# Altium PCB PCB2.PcbDoc
Units mm, origin at the board's own origin, x right, y up, seen from the top; angles counter-clockwise.
Board outline 90.02 x 108.25 mm, 2 copper layers (Top Layer, Bottom Layer); 75 components, 64 nets, 332 pads, 80 vias.
Unrouted connection lines stored in the file: 1.
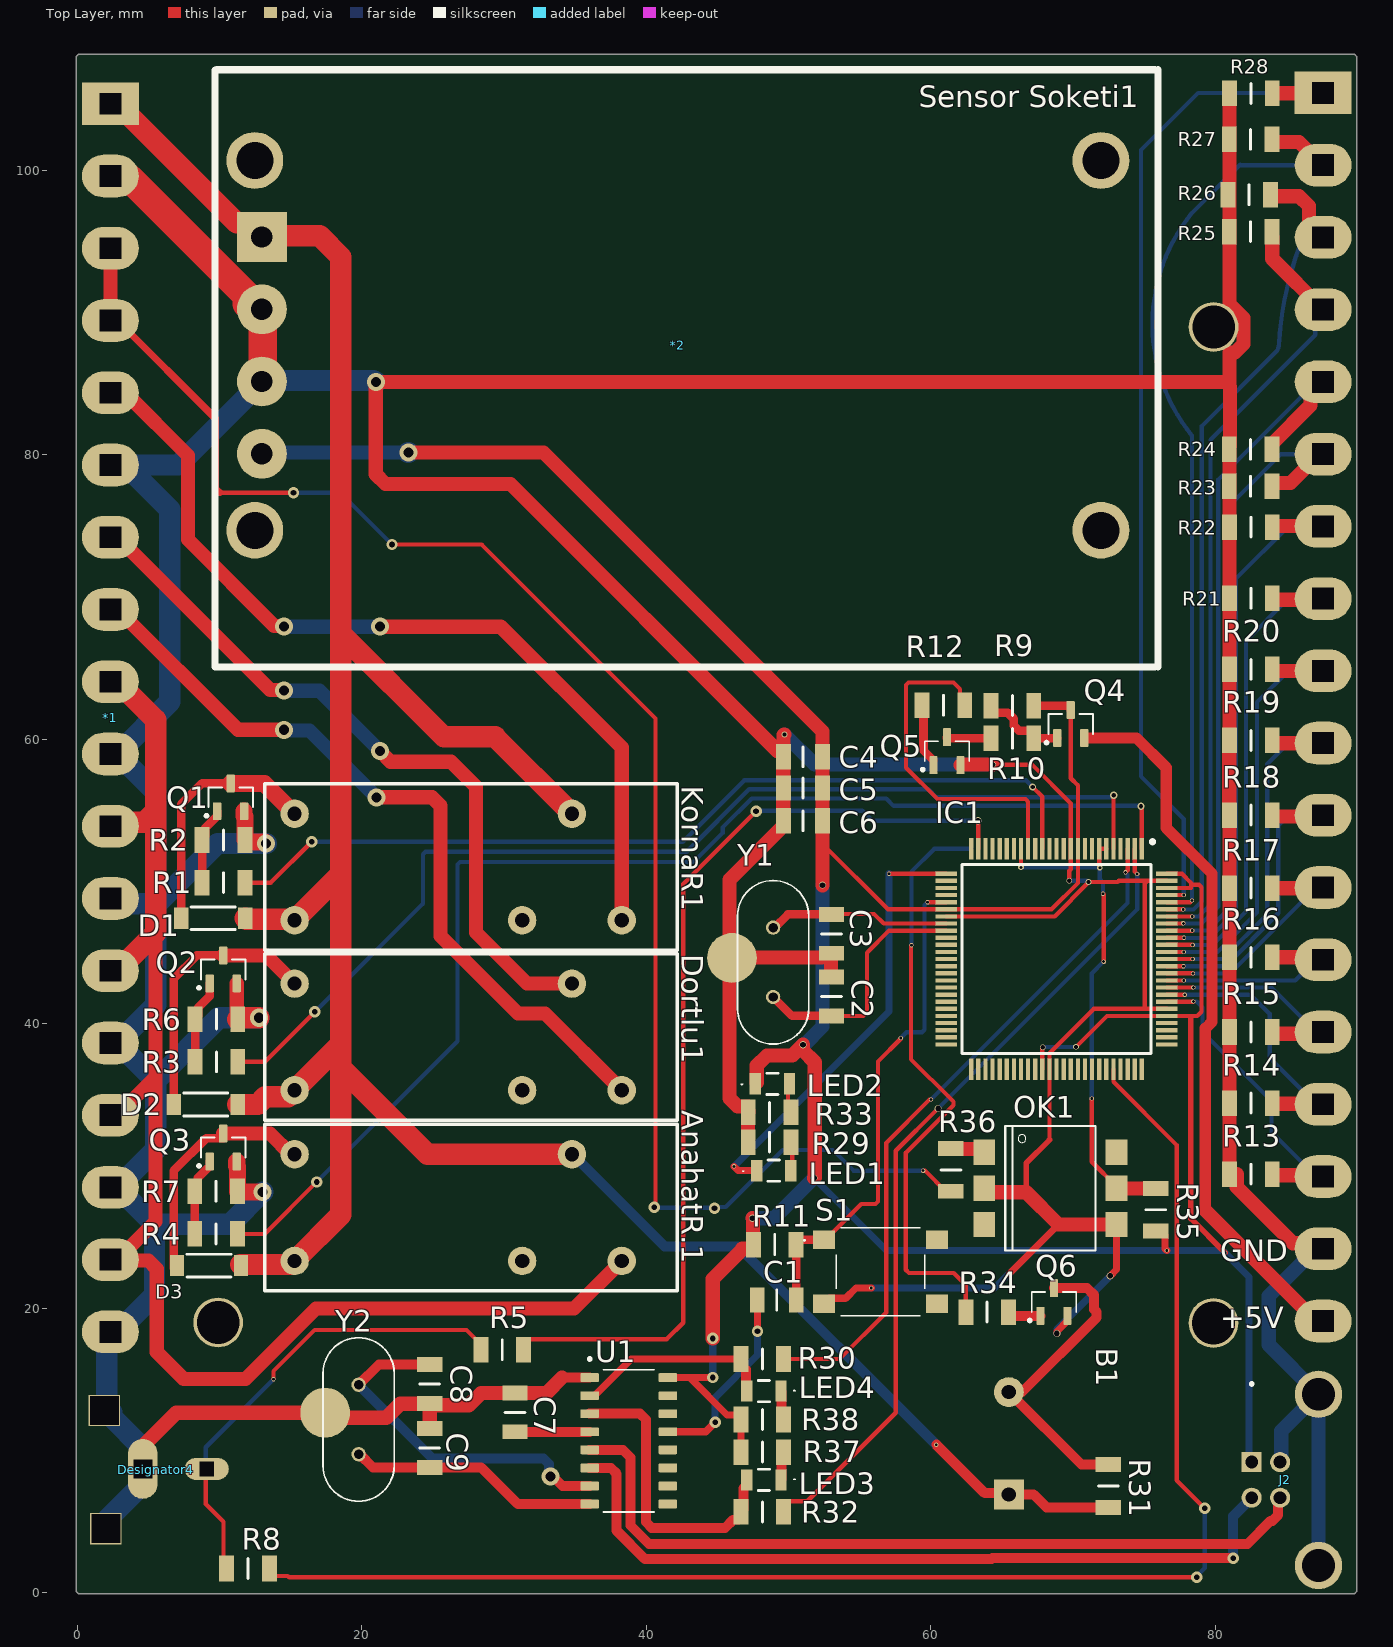
[diagram p0: Top Layer view]
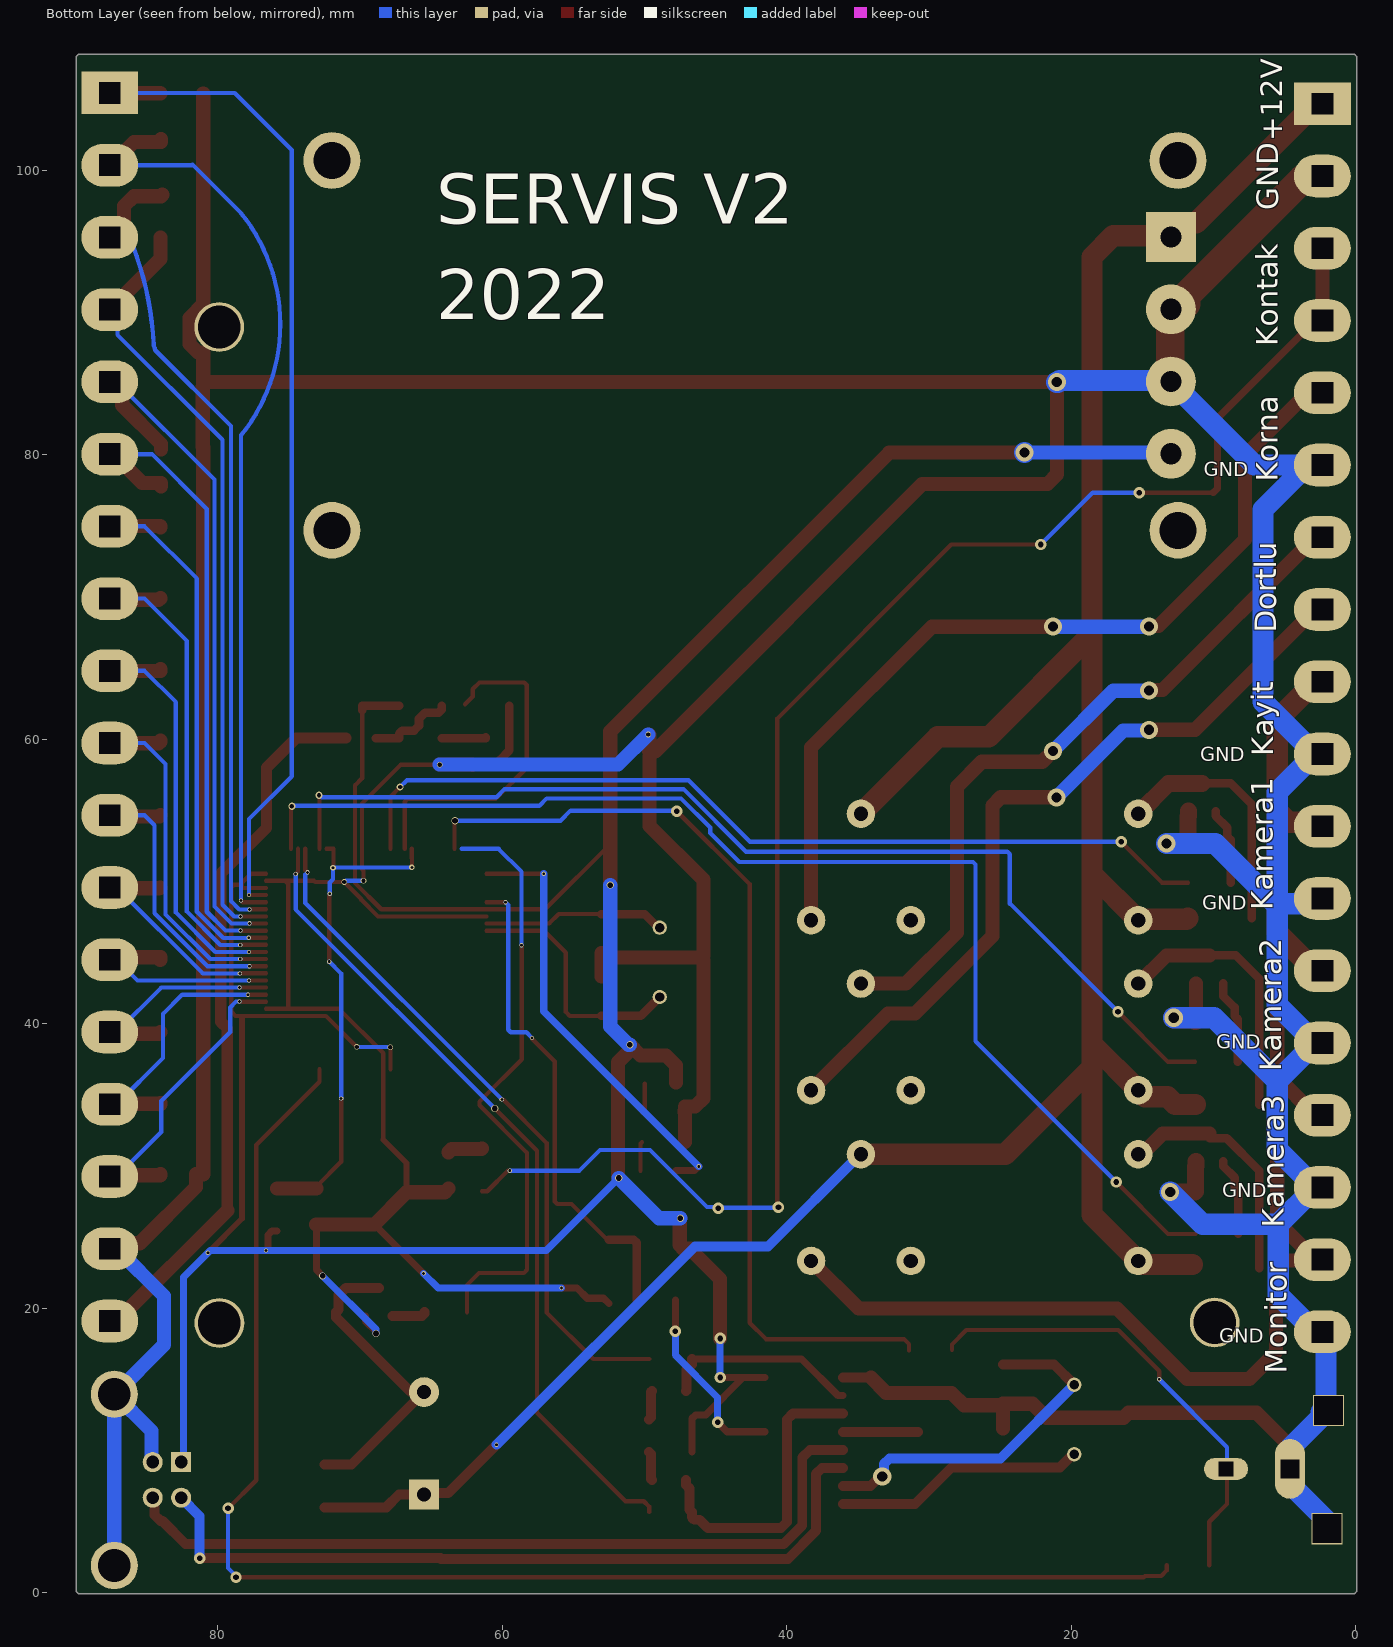
[diagram p1: Bottom Layer view, seen from below]
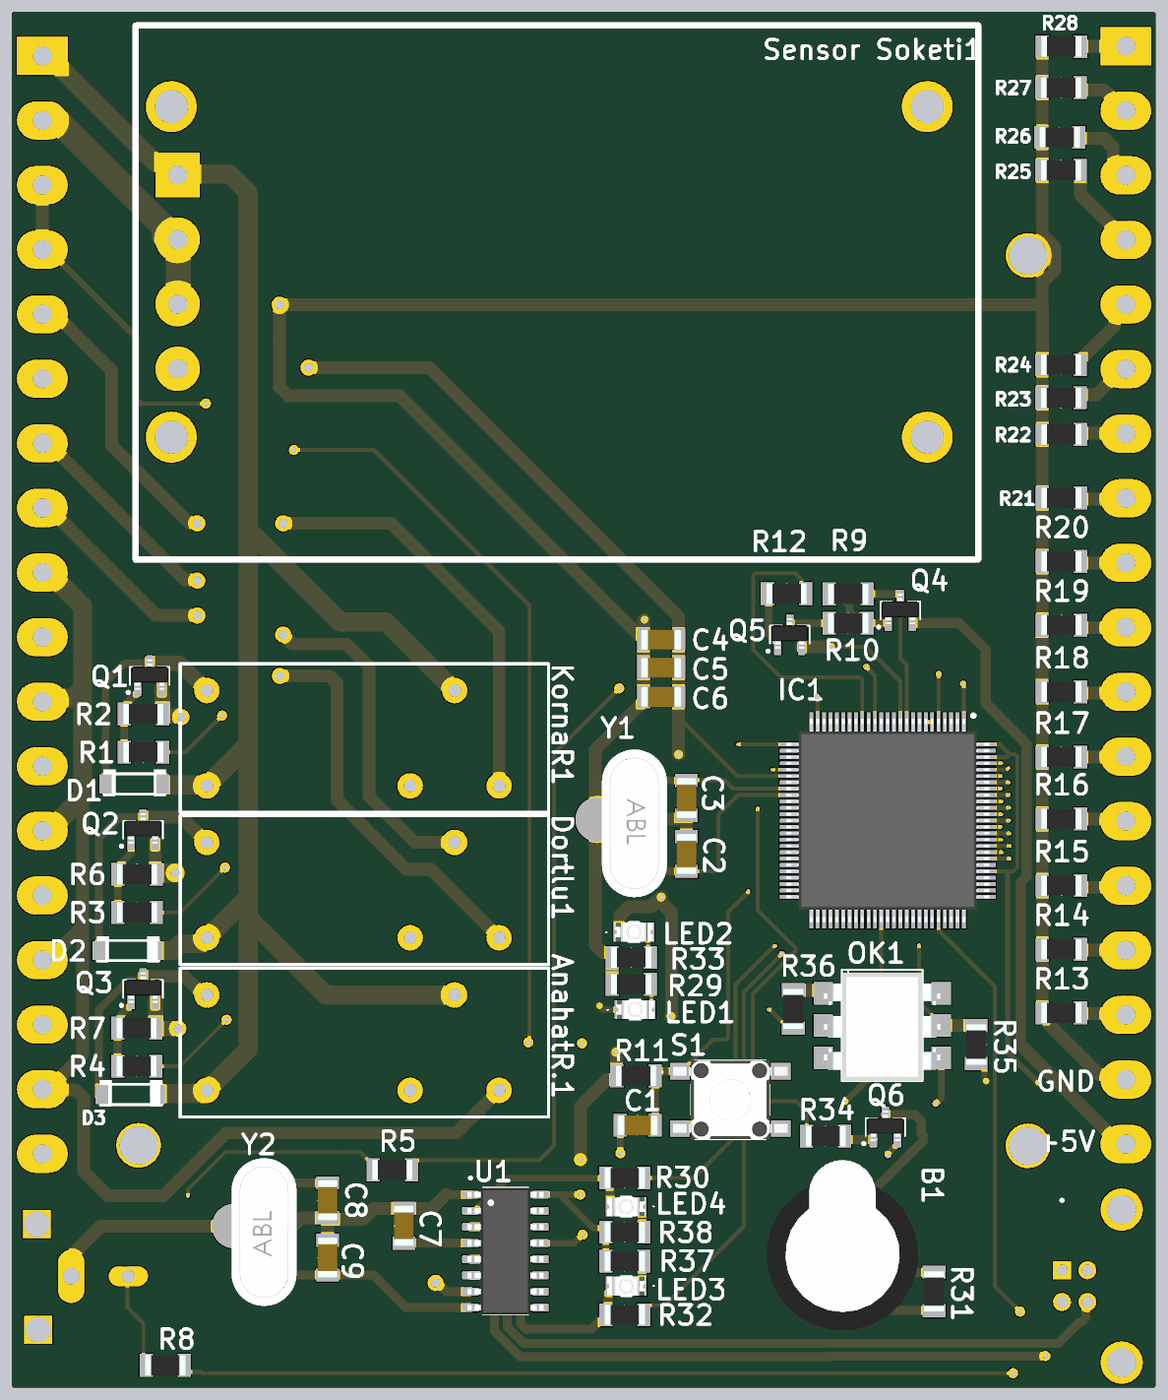
[diagram p2: 3D render of the assembled board from above, using the file's embedded part models]

## Layer stack, top to bottom
Top Solder: solder mask 0.0102, Solder Resist, Dk 3.5
Top Layer: signal copper 0.0356
Dielectric 1: dielectric 0.32, FR-4, Dk 4.8
Bottom Layer: signal copper 0.0356
Bottom Solder: solder mask 0.0102, Solder Resist, Dk 3.5

## Board outline
-0.074,0.074 -0.074,108.026 0.074,108.175 89.801,108.175 89.95,108.026 89.95,0.074 89.801,-0.074 0.074,-0.074

## Design rules (kind name [scope] priority, off if disabled: settings)
Clearance [All] p1: gap=0.19 ignorepadtopadclearanceinfootprint=FALSE except(0: Arc-Hole Track-Hole SMDPad-Hole THPad-Hole Via-Hole Fill-Hole Poly-Hole Region-Hole Text-Hole)
ComponentClearance [All] p1: gap=0 collisioncheckmode=3 verticalgap=0 showdistances=FALSE
PolygonConnect [All] p1: connectstyle=Relief reliefconductorwidth=0.254 reliefentries=4 polygonreliefangle="90 Angle" airgapwidth=0.254
RoutingVias [All] p1: holewidth=0.711 width=1.27 viastyle="Through Hole" minholewidth=0.1 minwidth=0.1 maxholewidth=10 maxwidth=10
SolderMaskExpansion [All] p1: expansion=0.102 istentingtop=FALSE
Width [All] p1: maxlimit=10 minlimit=0.1 preferedwidth=0.254 minimp=50.000000 maximp=50.000000 favimp=50.000000
29 further rules are at their usual default settings.

## Classes and differential pairs
component class Sheet1: *2 AnahatR.1 B1 C1 C2 C3 C4 C5 C6 C7 C8 C9 D1 D2 D3 Dortlu1 IC1 J2 KornaR1 LED1 LED2 LED3 LED4 OK1 Q1 Q2 Q3 Q4 Q5 Q6 R1 R2 R3 R4 R5 R6 R7 R8 R9 R10 R11 R12 R13 R14 R15 R16 R17 R18 R19 R21 R29 R30 R31 R32 R33 R34 R35 R36 R37 R38 S1 T1 T2 T3 U1 Y1 Y2

## Components (designator, comment, footprint, x,y, rotation, side; value= is the part's Value field where it differs from the comment)
*1 "18PİN" 18X5,08 2.327,104.696 r270 top
*2 "12/5 DC/DC" "12/5V DC/DC" 12.977,85.166 r0 top
AnahatR.1 "Röle" RöLE 15.277,23.326 r0 top
B1 "Buzzer" BUZZER 65.5,6.9 r90 top
C1 "100nF 1206" "CAPC3216X95N(100NF 1206)" 49.177,20.576 r0 top
C2 "22pF 1206" "CAPC3216X95N(100NF 1206)" 53.027,41.926 r90 top
C3 "22pF 1206" "CAPC3216X95N(100NF 1206)" 53.027,46.326 r270 top
C4 "100nF 1206" "CAPC3216X95N(100NF 1206)" 51.027,58.776 r0 top
C5 "1uF 1206" "CAPC3216X95N(100NF 1206)" 51.027,56.576 r0 top
C6 "10uF 1206" "CAPC3216X95N(100NF 1206)" 51.027,54.276 r0 top
C7 "10nF 1206" "CAPC3216X95N(100NF 1206)" 30.777,12.676 r90 top
C8 "18pF 1206" "CAPC3216X95N(100NF 1206)" 24.777,14.676 r90 top
C9 "18pF 1206" "CAPC3216X95N(100NF 1206)" 24.777,10.176 r270 top
D1 "1N4007" 1N4007 11.802,47.426 r180 top
D2 "1N4007" 1N4007 11.277,34.326 r180 top
D3 "1N4007" 1N4007 11.5,23 r180 top
Designator4 "Comment" RCA 1.8,8.9 r180 top
Dortlu1 "Röle" RöLE 15.277,35.326 r0 top
IC1 "ATMEGA2560-16AI" QFP50P1600X1600X120-100N 68.857,44.552 r270 top
J2 "USB-B-S-X-X-TH" USB-B-S-X-X-TH 87.277,7.926 r90 top
KornaR1 "Röle" RöLE 15.277,47.276 r0 top
LED1 "led 1206" "LED 1206" 48.977,29.676 r0 top
LED2 "led 1206" "LED 1206" 48.877,35.776 r0 top
LED3 "led 1206" "LED 1206" 48.277,7.926 r180 top
LED4 "led 1206" "LED 1206" 48.277,14.176 r180 top
OK1 "4N25 SOIC6" "4N25 SOIC6" 68.427,28.426 r270 top
Q1 "BC817" "BC817 SOT23" 10.781,55.926 r90 top
Q2 "BC817" "BC817 SOT23" 10.256,43.826 r90 top
Q3 "BC817" "BC817 SOT23" 10.256,31.306 r90 top
Q4 "BC817" "BC817 SOT23" 69.852,61.076 r90 top
Q5 "BC817" "BC817 SOT23" 61.152,59.176 r90 top
Q6 "BC817" "BC817 SOT23" 68.677,20.436 r90 top
R1 "1K Res 1206" "RESC3216X60N ( 1206 )" 10.277,49.926 r180 top
R2 "10K Res 1206" "RESC3216X60N ( 1206 )" 10.277,52.926 r180 top
R3 "1K Res 1206" "RESC3216X60N ( 1206 )" 9.777,37.326 r180 top
R4 "1K Res 1206" "RESC3216X60N ( 1206 )" 9.752,25.226 r180 top
R5 "1K Res 1206" "RESC3216X60N ( 1206 )" 29.875,17.075 r180 top
R6 "10K Res 1206" "RESC3216X60N ( 1206 )" 9.777,40.326 r180 top
R7 "10K Res 1206" "RESC3216X60N ( 1206 )" 9.752,28.226 r180 top
R8 "470R 1206" "RESC3216X60N ( 1206 )" 12,1.7 r180 top
R9 "10K Res 1206" "RESC3216X60N ( 1206 )" 65.752,62.376 r0 top
R10 "1K Res 1206" "RESC3216X60N ( 1206 )" 65.752,60.076 r0 top
R11 "10K Res 1206" "RESC3216X60N ( 1206 )" 49.042,24.476 r0 top
R12 "1K Res 1206" "RESC3216X60N ( 1206 )" 60.9,62.4 r180 top
R13 "10K Res 1206" "RESC3216X60N ( 1206 )" 82.527,29.426 r0 top
R14 "10K Res 1206" "RESC3216X60N ( 1206 )" 82.527,34.426 r0 top
R15 "10K Res 1206" "RESC3216X60N ( 1206 )" 82.527,39.426 r0 top
R16 "10K Res 1206" "RESC3216X60N ( 1206 )" 82.527,44.676 r0 top
R17 "10K Res 1206" "RESC3216X60N ( 1206 )" 82.527,49.546 r0 top
R18 "10K Res 1206" "RESC3216X60N ( 1206 )" 82.527,54.676 r0 top
R19 "10K Res 1206" "RESC3216X60N ( 1206 )" 82.527,59.926 r0 top
R20 "10K Res 1206" "RESC3216X60N ( 1206 )" 82.527,64.926 r0 top
R21 "10K Res 1206" "RESC3216X60N ( 1206 )" 82.527,69.926 r0 top
R22 "10K Res 1206" "RESC3216X60N ( 1206 )" 82.527,74.926 r0 top
R23 "10K Res 1206" "RESC3216X60N ( 1206 )" 82.5,77.8 r0 top
R24 "10K Res 1206" "RESC3216X60N ( 1206 )" 82.5,80.4 r0 top
R25 "10K Res 1206" "RESC3216X60N ( 1206 )" 82.5,95.7 r0 top
R26 "10K Res 1206" "RESC3216X60N ( 1206 )" 82.4,98.3 r0 top
R27 "10K Res 1206" "RESC3216X60N ( 1206 )" 82.5,102.2 r0 top
R28 "10K Res 1206" "RESC3216X60N ( 1206 )" 82.527,105.426 r0 top
R29 "470R 1206" "RESC3216X60N ( 1206 )" 48.677,31.676 r180 top
R30 "1K Res 1206" "RESC3216X60N ( 1206 )" 48.168,16.426 r0 top
R31 "1K Res 1206" "RESC3216X60N ( 1206 )" 72.5,7.5 r270 top
R32 "1K Res 1206" "RESC3216X60N ( 1206 )" 48.168,5.676 r0 top
R33 "470R 1206" "RESC3216X60N ( 1206 )" 48.677,33.776 r180 top
R34 "1K Res 1206" "RESC3216X60N ( 1206 )" 63.977,19.726 r0 top
R35 "10K Res 1206" "RESC3216X60N ( 1206 )" 75.827,26.926 r270 top
R36 "1K Res 1206" "RESC3216X60N ( 1206 )" 61.427,29.726 r90 top
R37 "2.7K Res" "RESC3216X60N ( 1206 )" 48.168,9.881 r180 top
R38 "2.7K Res" "RESC3216X60N ( 1206 )" 48.168,12.176 r180 top
S1 "Switch 6x6mm" "6X6X8MM PUSH BUTON" 56.477,22.576 r0 top
"Sensor Soketi1" "18PİN" 18X5,08 87.602,105.461 r270 top (schematic designator "Sensör Soketi1")
U1 "CH340G" SOIC16 38.777,10.676 r0 top
Y1 "16.000MHZ Crsytal" XTAL_DIP 48.927,44.326 r270 top
Y2 "12.000MHZ Crsytal" XTAL_DIP 19.777,12.176 r90 top

## Footprints (in the part's own frame and the unit in brackets; to place one, negate y for a bottom-side part, rotate by r counter-clockwise, add the part's x,y. Pads: shape width x height; smd on the part's side, far side on the other; paste and mask are expansions set on the pad)
1N4007 [mm]
  rect 1x1.5 smd: 1(0,0) 2(4.5,0)
  silkscreen extent 0.7,-0.8 3.8,0.8, body extent -0.45,-1.9 4.85,1.72
"4N25 SOIC6" [mm]
  rect 1.78x1.52 smd: 1(-2.54,-4.645) 2(0,-4.645) 3(2.54,-4.645) 4(2.54,4.645) 5(0,4.645) 6(-2.54,4.645)
  silkscreen extent -4.39,-3.18 4.36,3.18, body extent -4.16,-4.58 4.36,4.58, height 4.99
"6X6X8MM PUSH BUTON" [mm]
  rect 1.55x1.3 smd: 1(-3.975,2.25) 2(-3.975,-2.25) 3(3.975,2.25) 4(3.975,-2.25)
  silkscreen extent -5.4,-3.1 3.1,3.1, body extent -4.5,-3.1 4.5,3.1, height 5
"12/5V DC/DC" [mm]
  rect 3.5x3.5 hole 1.5: 1(0,10.16)
  round 3.5 hole 1.5: 2(0,5.08) 3(0,0) 4(0,-5.08)
  round 4 hole 2.6: ""(-0.5,-10.46) ""(-0.5,15.54) ""(59,-10.46) ""(59,15.54)
  silkscreen extent -3.3,-20.09 63,21.93
18X5,08 [mm]
  rect 3x4 hole 1.5 square: 1(0,0)
  oval 3x4 hole 1.5 square: 2(5.08,0) 3(10.16,0) 4(15.24,0) 5(20.32,0) 6(25.4,0) 7(30.48,0) 8(35.56,0) 9(40.64,0) 10(45.72,0) 11(50.8,0) 12(55.88,0) 13(60.96,0) 14(66.04,0) 15(71.12,0) 16(76.2,0) 17(81.28,0) 18(86.36,0)
"BC817 SOT23" [mm]
  rrect25% 1.26x0.59 smd: 1(-0.98,0.95) 2(-0.98,-0.95) 3(0.98,0)
  silkscreen extent -1.4,-1.56 0.7,1.8, body extent -1.1,-1.45 1.3,1.45, height 0.91
BUZZER [mm]
  rect 2.1x2.1 hole 1: 1(0,0)
  round 2.1 hole 1: 2(7.2,0)
  body extent -2.5,-5.8 10.94,6.2, height 9.55
"CAPC3216X95N(100NF 1206)" [mm]
  rect 1.04x1.78 smd: 1(-1.37,0) 2(1.37,0)
  silkscreen extent 0,-0.7 0,0.7, body extent -1.6,-0.8 1.6,0.8, height 0.95
"LED 1206" [mm]
  rect 0.8x1.5 smd: 1(-1.2,0) 2(1.2,0)
  silkscreen extent -2.2,-0.75 0.4,0.75, body extent -1.5,-0.75 1.5,0.75, height 1.21
QFP50P1600X1600X120-100N [mm]
  rect 1.5x0.3 smd: 1(-7.75,6) 2(-7.75,5.5) 3(-7.75,5) 4(-7.75,4.5) 5(-7.75,4) 6(-7.75,3.5) 7(-7.75,3) 8(-7.75,2.5) 9(-7.75,2) 10(-7.75,1.5) 11(-7.75,1) 12(-7.75,0.5) 13(-7.75,0) 14(-7.75,-0.5) 15(-7.75,-1) 16(-7.75,-1.5) 17(-7.75,-2) 18(-7.75,-2.5) 19(-7.75,-3) 20(-7.75,-3.5) 21(-7.75,-4) 22(-7.75,-4.5) 23(-7.75,-5) 24(-7.75,-5.5) 25(-7.75,-6) 51(7.75,-6) 52(7.75,-5.5) 53(7.75,-5) 54(7.75,-4.5) 55(7.75,-4) 56(7.75,-3.5) 57(7.75,-3) 58(7.75,-2.5) 59(7.75,-2) 60(7.75,-1.5) 61(7.75,-1) 62(7.75,-0.5) 63(7.75,0) 64(7.75,0.5) 65(7.75,1) 66(7.75,1.5) 67(7.75,2) 68(7.75,2.5) 69(7.75,3) 70(7.75,3.5) 71(7.75,4) 72(7.75,4.5) 73(7.75,5) 74(7.75,5.5) 75(7.75,6)
  rect 0.3x1.5 smd: 26(-6,-7.75) 27(-5.5,-7.75) 28(-5,-7.75) 29(-4.5,-7.75) 30(-4,-7.75) 31(-3.5,-7.75) 32(-3,-7.75) 33(-2.5,-7.75) 34(-2,-7.75) 35(-1.5,-7.75) 36(-1,-7.75) 37(-0.5,-7.75) 38(0,-7.75) 39(0.5,-7.75) 40(1,-7.75) 41(1.5,-7.75) 42(2,-7.75) 43(2.5,-7.75) 44(3,-7.75) 45(3.5,-7.75) 46(4,-7.75) 47(4.5,-7.75) 48(5,-7.75) 49(5.5,-7.75) 50(6,-7.75) 76(6,7.75) 77(5.5,7.75) 78(5,7.75) 79(4.5,7.75) 80(4,7.75) 81(3.5,7.75) 82(3,7.75) 83(2.5,7.75) 84(2,7.75) 85(1.5,7.75) 86(1,7.75) 87(0.5,7.75) 88(0,7.75) 89(-0.5,7.75) 90(-1,7.75) 91(-1.5,7.75) 92(-2,7.75) 93(-2.5,7.75) 94(-3,7.75) 95(-3.5,7.75) 96(-4,7.75) 97(-4.5,7.75) 98(-5,7.75) 99(-5.5,7.75) 100(-6,7.75)
  silkscreen extent -8.37,-6.65 6.65,6.88, body extent -8,-8 8,8, height 1.2
RCA [mm]
  oval 2.1x4.2 hole 1.3 square: 1(-2.8,0.2)
  rect 2.2x2.2 hole 2 square: 1(-0.2,4.4) 1(-0.1,-3.9)
  oval 3.1x1.55 hole 1 square: 2(-7.3,0.2)
"RESC3216X60N ( 1206 )" [mm]
  rect 1.05x1.8 smd: 1(-1.5,0) 2(1.5,0)
  silkscreen extent 0,-0.7 0,0.7, body extent -1.58,-0.8 1.58,0.8, height 0.6
RöLE [mm]
  round 2 hole 1: 1(16,0) 2(19.5,7.5) 3(23,0) 4(0,0) 5(0,7.5)
  silkscreen extent -2.1,-2.1 26.9,9.6, body extent -2.1,-2.1 26.9,9.6, height 20
SOIC16 [mm]
  rrect25% 1.31x0.62 smd: 1(-2.75,4.445) 2(-2.75,3.175) 3(-2.75,1.905) 4(-2.75,0.635) 5(-2.75,-0.635) 6(-2.75,-1.905) 7(-2.75,-3.175) 8(-2.75,-4.445) 9(2.75,-4.445) 10(2.75,-3.175) 11(2.75,-1.905) 12(2.75,-0.635) 13(2.75,0.635) 14(2.75,1.905) 15(2.75,3.175) 16(2.75,4.445)
  silkscreen extent -2.85,-5 1.78,5.85, body extent -3,-5 3,5, height 1.8
USB-B-S-X-X-TH [mm]
  rect 1.408x1.408 hole 0.9: 1(1.25,4.7)
  round 1.408 hole 0.9: 2(-1.25,4.7) 3(-1.25,2.7) 4(1.25,2.7)
  round 3.316 hole 2.3: S1(-6.02,0) S2(6.02,0)
  silkscreen extent 6.65,4.6 6.85,4.8
XTAL_DIP [mm]
  round 1.007 hole 0.657: 1(-2.44,0) 2(2.44,0)
  silkscreen extent -5.75,-2.5 5.75,2.5, body extent -5.75,-2.5 5.75,2.5, height 3.65

## Part data
B1: "TERMINAL BLOCK,HEADER, 5.08 MM, 2WAY; Product Range:-; Gender:Header", Package=None, Availability=Unavailable, EU_RoHS_Compliance=Compliant, MF="TE Connectivity", MP=282814-2, Price=None, SnapEDA_Link=https://www.snapeda.com/parts/282814-2/TE%20Connectivity%20AMP%20Connectors/view-part/2381383/?ref=snap, TE_purchase_URL=https://www.te.com/usa-en/product-282814-2.html?te_bu=Cor&te_type=disp&te_campaign=seda_glo_cor-seda-global-disp-prtnr-fy19-seda-model-bom-cta_sma-317_1&elqCampaignId=32493
C1 C2 C3 C4 C5 C6 C7 C8 C9: "Capacitor", Arrow Part Number=GRM319F51H104ZA01D, Manufacturer_Name="Murata Electronics", Mouser Part Number=81-GRM319F51H104ZA, Arrow Price/Stock=https://www.arrow.com/en/products/grm319f51h104za01d/murata-manufacturing, Datasheet Link=https://datasheet.datasheetarchive.com/originals/distributors/Datasheets-DGA9/2502990.pdf, Height=0.95mm, Manufacturer_Part_Number=GRM319F51H104ZA01D, Mouser Price/Stock=https://www.mouser.com/Search/Refine.aspx?Keyword=81-GRM319F51H104ZA
D1 D2 D3: "Diode", Arrow Part Number=1SS400SMT2R, Manufacturer_Name="ROHM Semiconductor", Mouser Part Number=755-1SS400SMT2R, Arrow Price/Stock=https://www.arrow.com/en/products/1ss400smt2r/rohm-semiconductor, Datasheet Link=https://datasheet.datasheetarchive.com/originals/distributors/Datasheets_SAMA/1cee01b15380e4b4ee81d9987647e9be.pdf, Height=0.7mm, Manufacturer_Part_Number=1SS400SMT2R, Mouser Price/Stock=https://www.mouser.co.uk/ProductDetail/ROHM-Semiconductor/1SS400SMT2R?qs=QcFhgjUTvvq%2Fjg4ayY%252BmJw%3D%3D
IC1: "Integrated Circuit", Manufacturer_Name=Microchip, Mouser Part Number=556-ATMEGA2560-16AI, Datasheet Link=https://www.datasheet5.com/part/ATMEGA2560-16AI/Atmel%20Corporation#pdf-wrapper, Height=1.2mm, Manufacturer_Part_Number=ATMEGA2560-16AI, Mouser Price/Stock=https://www.mouser.co.uk/ProductDetail/Microchip-Technology-Atmel/ATMEGA2560-16AI?qs=b1J4i6otjZtlyidGHqdxdQ%3D%3D
J2: "USB-B (USB TYPE-B) USB 2.0 Receptacle Connector 4 Position Through Hole, Right Angle", Package=None, Availability=Unavailable, MP=USB-B-S-X-X-TH, Price=None
LED1 LED2 LED3 LED4: "LED", Manufacturer_Name="Wurth Elektronik", Manufacturer_Part_Number=15412085A9000, Mouser Part Number=710-15412085A9000, Datasheet Link=https://www.we-online.com/catalog/datasheet/15412085A9000.pdf, Height=1.21mm, Mouser Price/Stock=https://www.mouser.co.uk/ProductDetail/Wurth-Elektronik/15412085A9000?qs=u16ybLDytRakpVDTKYCvNw%3D%3D
OK1: "Optoisolator Transistor with Base Output 4170Vrms 1 Channel 6-SMD", Package="SMD-6 ON Semiconductor", Availability=Unavailable, MF="ON Semiconductor", MP=4N25SM, Price=None, SnapEDA_Link=https://www.snapeda.com/parts/4N25SM/ON%20Semiconductor/view-part/2630074/?ref=snap
Q1 Q2 Q3 Q4 Q5 Q6: "Bipolar _BJT_ Transistor NPN 45V 500mA 100MHz 300mW Surface Mount SOT-23-3 _TO-236_", Package="SOT-23-3 Rectron", Availability=Unavailable, MF="Nexperia USA", MP=BC817, Price=None, SnapEDA_Link=https://www.snapeda.com/parts/BC817/Nexperia%20USA%20Inc./view-part/4219270/?ref=snap
R1 R2 R3 R4 R5 R6 R7 R8 R9 R10 R11 R12 R13 R14 R15 R16 R17 R18 R19 R20 R21 R22 R23 R24 R25 R26 R27 R28 R29 R30 R31 R32 R33 R34 R35 R36 R37 R38: "Resistor", Arrow Part Number=CRCW120610K0DHEAP, Manufacturer_Name=Vishay, Mouser Part Number=71-CRCW120610K0DHEAP, Arrow Price/Stock=https://www.arrow.com/en/products/crcw120610k0dheap/vishay, Datasheet Link=http://componentsearchengine.com/Datasheets/1/CRCW120610K0DHEAP.pdf, Height=0.6mm, Manufacturer_Part_Number=CRCW120610K0DHEAP, Mouser Price/Stock=https://www.mouser.co.uk/ProductDetail/Vishay-Dale/CRCW120610K0DHEAP?qs=4BdzfeD6%252Bt0oQlLvLz8F%2Fg%3D%3D
S1: "Switch", Manufacturer_Name="Wurth Elektronik", Manufacturer_Part_Number=430182070816, Mouser Part Number=710-430182070816, Datasheet Link=https://datasheet.datasheetarchive.com/originals/distributors/DKDS-9/165015.pdf, Height=7.15mm, Mouser Price/Stock=https://www.mouser.co.uk/ProductDetail/Wurth-Elektronik/430182070816?qs=wr8lucFkNMXtq9RwGFkUbg%3D%3D
U1: Package=None, Availability=Unavailable, MP=CH340G, Price=None
Y1 Y2: "Crystal or Oscillator", Arrow Part Number=ABLS2-16.000MHZ-D4Y-T, Manufacturer_Name=ABRACON, Mouser Part Number=815-ABLS2-16-D4Y-T, Arrow Price/Stock=https://www.arrow.com/en/products/abls2-16.000mhz-d4y-t/abracon?region=nac, Datasheet Link=https://abracon.com/Resonators/ABLS2.pdf, Manufacturer_Part_Number=ABLS2-16.000MHZ-D4Y-T, Mouser Price/Stock=https://www.mouser.co.uk/ProductDetail/ABRACON/ABLS2-16.000MHZ-D4Y-T?qs=LoTOQoUkC8S5C2377M50iA%3D%3D

## Free pads (board coordinates)
  round 3.5 hole 3: ""(9.9,19) ""(79.891,18.961) ""(79.9,89)
  round 3.5 smd: ""(17.427,12.651) ""(46.032,44.633)

## Via types
v1: diameter 0.3, hole 0.2, Top Layer to Bottom Layer, 34 vias
v2: diameter 0.8, hole 0.4, Top Layer to Bottom Layer, 15 vias
v3: diameter 1.27, hole 0.711, Top Layer to Bottom Layer, 12 vias
v4: diameter 0.5, hole 0.4, Top Layer to Bottom Layer, 8 vias
v5: diameter 0.4, hole 0.3, Top Layer to Bottom Layer, 6 vias
v6: diameter 0.5, hole 0.3, Top Layer to Bottom Layer, 3 vias
v7: diameter 0.4, hole 0.2, Top Layer to Bottom Layer, 2 vias

## Nets (pads, with @x,y where several pads share a name; then routed paths per layer and width w, separated by ;. In a path a pad name is that pad's centre, name@x,y a point inside that pad or via, vN(x,y) a via of type N, cw(c..) or ccw(c..) an arc to the next point about the centre after c; other vN are vias at no path point)
5V: *2.4 C4.2 C5.2 C6.2 IC1.10 IC1.31 IC1.61 IC1.80 IC1.98 IC1.100 J2.1 LED2.1 Q4.3 R9.2 R11.1 R35.2 R37.2 R38.2 U1.16 | length 242.9
  Top Layer w0.3: 52.397,52.656 57.001,48.052 IC1.31 68.503,48.052 70.357,49.906 IC1.10 70.357,56.768 69.852,57.273 Q4.3 ; IC1.61 67.857,38.304 67.877,38.324 v5(67.877,38.351) ; v5(70.227,38.376) 72.403,40.552 IC1.80 78.25,40.552 78.752,40.552 79.05,40.85 79.05,49.607 78.874,49.783 78.442,49.783 78.312,49.913 ; IC1.98 78.312,49.552 78.312,49.913 ; IC1.100 77.673,50.552 78.312,49.913
  Top Layer w0.4: 78.3,40.502 78.3,26.3 v1(80.7,23.9)
  Top Layer w0.5: U1.16 43.065,15.121 ; v2(44.677,15.126) 44.672,15.121 43.065,15.121 ; R37.2 46.668,12.225 46.393,12.5 45.685,12.5 43.065,15.121 ; R35.2 76.202,25.426 76.477,25.151 76.477,24.184 v1(76.61,24.051)
  Top Layer w0.6: R9.2 69.847,62.376 69.852,62.371 Q4.3
  Top Layer w1: v3(23.277,80.176) 32.777,80.176 52.397,60.556 C5.2 C6.2 52.397,52.656 52.397,49.756 v4(52.402,49.751) ; v2(44.677,17.876) 44.677,22.051 46.752,24.126 46.752,24.183 47.267,24.183 47.542,24.458 R11.1 47.517,24.501 47.517,26.286 v4(47.477,26.326) ; LED2.1@47.777,35.876 47.777,37.065 48.488,37.776 50.277,37.776 v4(51.027,38.526) 51.027,38.126 51.852,37.301 51.852,29.201 v4(51.802,29.151)
  Bottom Layer w0.3: v5(67.877,38.351) 67.889,38.363 70.214,38.363 v5(70.227,38.376)
  Bottom Layer w0.5: v2(44.677,15.126) v2(44.677,17.876) ; v4(51.802,29.151) 56.902,24.051 77.427,24.051 80.549,24.051 v1(80.7,23.9) 82.4,22.2 82.4,9.352 J2.1
  Bottom Layer w1: *2.4@13.027,80.171 v3@23.272,80.171 ; v4(47.477,26.326) 48.977,26.326 v4(51.802,29.151) ; v4(51.027,38.526) 51.127,38.526 52.402,39.801 v4(52.402,49.751)
  Bottom Layer w1.5: v3@23.272,80.171 v3(23.277,80.176)
+12: *1.1 *2.1 AnahatR.1.2 AnahatR.1.4 B1.1 D1.1 D2.1 D3.1 Dortlu1.4 KornaR1.2 KornaR1.4 R31.2 | length 201.9
  Top Layer w0.7: v1(60.402,10.401) 63.81,6.992 65.408,6.992 B1.1 67.251,6.9 68.151,6 R31.2
  Top Layer w1.5: *1.1 2.827,104.696 11.197,96.326 12.112,96.326 13.027,95.411 17.042,95.411 18.527,93.926 18.527,67.426 ; D2.1 12.677,34.326 13.218,34.866 14.818,34.866 Dortlu1.4 18.527,38.576 ; D3.1@11.477,23.076 15.027,23.076 AnahatR.1.4 18.527,26.576 18.527,36.926 ; D1.1 11.877,47.351 15.202,47.351 KornaR1.4 18.527,50.526 ; AnahatR.1.2 24.627,30.826 18.527,36.926 ; KornaR1.2 29.377,60.176 25.777,60.176 18.527,67.426 ; 18.527,36.926 18.527,38.576 ; 18.527,38.576 18.527,50.526 ; 18.527,50.526 18.527,67.426
  Bottom Layer w0.7: AnahatR.1.2 34.827,30.826 41.302,24.351 46.452,24.351 v1(60.402,10.401)
D2: IC1.6 IC1.7 IC1.18 OK1.5 R35.1 | length 35.2
  Top Layer w0.3: v7(66.352,51.001) 66.352,51.651 66.357,51.656 IC1.18 ; v1(71.327,34.751) 71.327,30.301 73.072,28.556 OK1.5 ; v7(71.902,50.976) 71.857,51.021 IC1.7 IC1.6 ; v1(72.127,49.151) 72.169,49.109 v1(72.169,44.371)
  Top Layer w1: OK1.5 R35.1
  Bottom Layer w0.3: v7(66.352,51.001) 66.364,50.988 71.889,50.988 v7(71.902,50.976) 71.902,50.162 72.127,49.937 v1(72.127,49.151) ; v1(71.327,34.751) 71.327,43.529 v1(72.169,44.371)
D4: IC1.1 R4.1 | length 87
  Top Layer w0.3: R4.1 13.177,25.226 v2(16.827,28.876) ; v6(74.795,55.302) 74.857,55.24 IC1.1
  Bottom Layer w0.3: v2(16.827,28.876) 26.727,38.776 26.727,51.2 26.903,51.376 43.327,51.376 45.377,53.426 45.377,53.801 47.427,55.851 56.877,55.851 57.402,55.326 74.772,55.326 v6(74.795,55.302)
D5: IC1.5 R3.1 | length 75.7
  Top Layer w0.3: R3.1 13.177,37.326 v2(16.702,40.851) ; IC1.5 72.857,56.056 v6(72.877,56.076)
  Bottom Layer w0.3: v2(16.702,40.851) 24.302,48.451 24.302,51.925 24.478,52.101 42.852,52.101 47.252,56.501 59.839,56.501 60.415,55.925 72.672,55.925 72.823,56.076 v6(72.877,56.076)
D6: IC1.15 R1.1 | length 63.2
  Top Layer w0.3: R1.1 13.602,49.926 v2(16.477,52.801) ; v6(67.177,56.651) 67.857,55.971 IC1.15
  Bottom Layer w0.3: v2(16.477,52.801) 42.577,52.801 46.902,57.126 66.702,57.126 v6(67.177,56.651)
D8: IC1.17 R12.1 | length 24.1
  Top Layer w0.3: R12.1@62.614,62.472 62.071,63.015 62.071,63.532 61.602,64.001 58.453,64.001 58.277,63.825 58.277,58.001 60.477,55.801 66.676,55.801 66.857,55.62 IC1.17
D11: IC1.24 R5.1 | length 68.3
  Top Layer w0.3: R5.1@31.4,17.025 31.4,17.475 31.75,17.825 41.45,17.825 42.602,18.976 42.602,49.826 v2(47.727,54.951) ; v4(63.327,54.276) 63.357,54.246 IC1.24
  Bottom Layer w0.3: v2(47.727,54.951) 47.764,54.988 55.189,54.988 55.902,54.276 v4(63.327,54.276)
D12: IC1.25 R34.1 | length 42.1
  Top Layer w0.3: v1(58.652,45.526) 58.627,45.501 58.627,37.501 61.427,34.701 61.603,34.525 61.603,34.276 58.252,30.926 58.252,22.701 58.477,22.476 61.627,22.476 62.477,21.626 R34.1
  Bottom Layer w0.3: v1(58.652,45.526) 58.652,50.701 60.252,52.301 62.852,52.301
D29: IC1.71 R8.1 | length 104.6
  Top Layer w0.3: R8.1@13.277,1.926 13.277,1.551 13.652,1.176 14.796,1.176 14.896,1.075 v2(78.725,1.075) ; IC1.71 72.857,35.921 77.302,31.475 77.302,7.9 v2(79.277,5.926)
  Bottom Layer w0.3: v2(78.725,1.075) 78.725,1.173 79.277,1.725 v2(79.277,5.926)
Dortlu1: *1.8 Dortlu1.3 | length 55.3
  Top Layer w1: *1.8 2.827,69.136 11.287,60.676 v3(14.527,60.676) ; v3(21.027,55.926) 24.941,55.926 25.527,55.34 25.527,46.176 30.981,40.721 32.881,40.721 Dortlu1.3
  Bottom Layer w1: v3(14.527,60.676) 14.578,60.624 16.328,60.624 v3(21.027,55.926)
Dortlu2: *1.7 Dortlu1.2 | length 51.5
  Top Layer w1: *1.7 2.827,74.216 13.565,63.477 14.475,63.477 v3(14.527,63.426) ; v3(21.277,59.176) 22.027,58.426 26.277,58.426 28.027,56.676 28.027,46.426 31.627,42.826 Dortlu1.2
  Bottom Layer w1: v3(14.527,63.426) 17.027,63.426 v3(21.277,59.176)
GND: "Sensor Soketi1.17" *1.2 *1.6 *1.10 *1.12 *1.14 *1.16 *1.18 *2.2 *2.3 C2.2 C3.2 C4.1 C5.1 C6.1 C7.2 C8.1 C9.1 Designator4.1 IC1.11 IC1.32 IC1.62 IC1.81 IC1.99 J2.4 J2.S1 J2.S2 OK1.2 OK1.4 pad.@17.427,12.651 pad.@46.032,44.633 pad.@79.9,89 Q1.2 Q2.2 Q3.2 Q5.2 Q6.2 R2.1 R6.1 R7.1 R13.1 R14.1 R15.1 R16.1 R17.1 R18.1 R19.1 R20.1 R21.1 R22.1 R23.1 R24.1 R25.1 R26.1 R27.1 R28.1 R29.2 R33.2 S1.2 U1.1 | length 585.8
  Top Layer w0.3: IC1.32 68.728,47.552 69.904,48.728 69.904,48.76 71.1,49.956 v5(71.1,49.975) 73.154,49.975 73.231,50.052 75.258,50.052 ; v5(64.402,58.226) 67.127,58.226 69.857,55.496 IC1.11 69.857,50.862 69.75,50.756 v5(69.75,50.062) ; IC1.62 68.357,37.932 71.477,41.052 75.052,41.052 ; 68.36,31.836 IC1.62@68.36,36.799 ; IC1.81 75.052,41.052 ; IC1.99 75.258,50.052 ; 75.052,41.052 75.052,49.845 75.258,50.052
  Top Layer w0.4: 66.727,28.151 66.727,30.203 68.36,31.836
  Top Layer w0.5: S1.2 52.877,20.701 54.027,20.701 54.752,21.426 v1(55.827,21.426) ; v1@65.542,22.436 68.992,25.886 ; v4(68.877,18.226) 68.877,18.371 69.627,19.121 Q6.2 ; v4(72.627,22.276) 73.072,22.721 OK1.4
  Top Layer w0.6: Q2.2 Q2.2@11.211,42.841 ; R6.1@11.211,40.392 R6.1
  Top Layer w0.7: 34.077,15.121 U1.1
  Top Layer w1: Designator4.1@4.527,9.176 4.527,10.226 6.952,12.651 15.952,12.651 16.302,12.301 21.727,12.301 22.712,13.286 24.757,13.286 C8.1 ; R6.1@11.211,40.392 Q2.2@11.211,42.841 ; v3@20.979,85.103 20.979,78.639 21.665,77.953 30.459,77.953 49.244,59.168 49.637,59.166 49.654,59.168 49.654,60.303 v5@49.702,60.351 ; v3@21.004,85.128 80.947,85.128 ; C9.1 C8.1 ; 34.077,15.121 33.002,14.046 C7.2 28.397,14.046 27.527,13.176 24.907,13.176 C8.1 ; pad.@46.053,44.653 52.329,44.653 52.634,44.958 C3.2@53.024,44.958 ; R29.2@47.154,31.698 R33.2@47.154,33.753 ; R33.2 47.152,34.171 47.136,34.171 46.44,34.178 45.854,34.764 45.854,44.455 46.032,44.633 45.854,44.811 45.854,50.128 49.634,53.908 C6.1@49.634,54.253 ; C6.1@49.634,54.298 C5.1@49.634,56.553 ; C5.1@49.634,56.598 C4.1@49.634,58.753 ; C2.2@53.004,43.318 C3.2@53.004,44.933 ; Q5.2 62.132,58.226 v5(64.402,58.226) ; OK1.2 63.782,28.411 64.042,28.151 66.727,28.151 68.992,25.886 OK1.4 ; R19.1@81.002,59.526 81.002,54.701 R18.1 R17.1 R16.1 R15.1 R13.1 ; R19.1@81.027,59.551 R20.1 R21.1 R22.1 81.027,80.551 81.052,80.576 81.052,80.918 81.052,84.776 81.027,84.801 81.027,85.176 81.027,87.2 81.4,87.2 82,87.8 82,89.627 81.027,90.6 81.027,95.426 81.027,100.426 R28.1 ; R13.1@81.527,29.426 81.527,28.53 85.492,24.566 86.822,24.566 87.115,24.273 87.197,24.191 87.197,24.181 87.582,24.181
  Top Layer w1.2: Q3.2 11.206,30.001 11.252,29.955 R7.1 11.302,28.176 v3(13.027,28.176) ; Q1.2 11.731,54.621 11.777,54.575 R2.1 11.927,52.776 13.177,52.776 v3(13.277,52.676)
  Top Layer w1.5: R6.1 11.377,40.426 v3(12.777,40.426)
  Top Layer w2: *1.2 2.518,99.424 3.695,99.424 12.874,90.246 *2.2 ; *2.2@11.913,90.618 12.334,90.618 *2.2@12.738,90.214 ; *2.3@13.027,85.251 *2.2@13.027,90.331
  Bottom Layer w0.3: v5@69.777,50.062 70.985,50.062 71.073,49.975 v5(71.1,49.975)
  Bottom Layer w0.5: v1(55.827,21.426) 64.502,21.426 v1(65.527,22.451) ; v4(68.877,18.226) 68.877,18.526 v4(72.627,22.276)
  Bottom Layer w1: v5(49.727,60.351) 51.852,58.226 v5(64.402,58.226) ; J2.4@84.655,9.218 84.655,11.366 87.277,13.988 J2.S2 ; J2.S1@87.277,1.948 J2.S2 ; 87.602,24.181 87.102,24.181 83.777,20.856 83.777,17.426 87.246,13.957 87.257,13.946 J2.S2
  Bottom Layer w1.5: Designator4.1@1.927,4.976 4.316,7.365 4.316,8.965 4.527,9.176 4.527,10.226 2.427,12.326 2.427,12.676 1.827,13.276 2.077,13.526 2.077,18.086 *1.18 2.827,18.336 5.425,20.934 5.425,25.897 ; *1.16 *1.16@2.827,28.496 ; *1.14 *1.14@2.827,38.656 ; *1.12 2.709,48.433 5.381,48.433 5.5,48.314 ; *1.10 *1.10@2.827,58.976 ; *1.6 *1.6@3.368,79.296 ; v3(12.777,40.426) 9.943,40.426 5.5,35.982 ; *2.3 7.107,79.296 *1.6@3.368,79.296 ; v3(13.027,28.176) 10.749,25.897 5.425,25.897 ; *2.3@13.039,85.238 20.816,85.238 20.929,85.126 v3(21.002,85.126) ; v3(13.277,52.676) 9.861,52.676 5.5,48.314 ; *1.16@2.827,28.496 5.5,31.169 5.5,35.982 ; *1.16@2.827,28.496 5.425,25.897 ; *1.14@2.827,38.656 5.5,41.329 5.5,48.314 ; *1.14@2.827,38.656 5.5,35.982 ; *1.10@2.827,58.976 6.5,62.649 6.5,76.164 *1.6@3.368,79.296 ; *1.10@2.827,58.976 5.5,56.302 5.5,48.314
Kamera1: *1.9 *1.11 *1.13 *1.15 *1.17 AnahatR.1.3 | length 101.8
  Top Layer w1: *1.17 *1.17@2.827,23.416 ; *1.15 2.827,33.576 5.5,36.249 ; 5.5,46.409 5.5,36.249 ; AnahatR.1.3 34.926,19.975 16.775,19.975 11.825,15.025 7.475,15.025 5.587,16.913 5.587,22.761 5.001,23.347 2.895,23.347 *1.17@2.827,23.416 ; *1.17@2.827,23.416 5.5,26.089 5.5,36.249
  Top Layer w1.5: *1.13 2.827,43.736 5.5,46.409 5.5,54.954 ; *1.11 2.614,54.183 4.729,54.183 5.5,54.954 ; *1.9 2.827,64.056 5.5,61.382 5.5,54.954
Korna: *1.5 KornaR1.3 | length 61.9
  Top Layer w1: *1.5 3.368,84.376 7.775,79.969 7.775,74.052 13.85,67.977 14.475,67.977 v3(14.527,67.926) ; v3(21.277,67.926) 29.777,67.926 38.277,59.426 KornaR1.3
  Bottom Layer w1: v3(14.527,67.926) v3(21.277,67.926)
Net*1_3: *1.3 *1.4 R36.1 | length 116.1
  Top Layer w0.3: 10.026,77.351 v2(15.202,77.351) ; v2(22.127,73.701) 28.427,73.701 40.652,61.476 40.652,27.176 v2(40.577,27.101) ; v2(44.802,27.026) v2@44.853,27.026 ; v1(59.475,29.675) 59.602,29.675 61.052,28.226 R36.1
  Top Layer w0.5: *1.4 2.827,89.456 9.7,82.582 9.7,77.643 9.993,77.351 10.026,77.351
  Top Layer w1: *1.4 *1.3
  Bottom Layer w0.3: v2(15.202,77.351) 18.477,77.351 v2(22.127,73.701) ; v2(40.577,27.101) 40.614,27.063 44.764,27.063 v2(44.802,27.026) 44.897,27.121 45.596,27.121 49.6,31.125 53.125,31.125 54.575,29.675 v1(59.475,29.675)
NetAnahatR.1_5: AnahatR.1.5 D3.2 Q3.3 | length 17.2
  Top Layer w0.6: D3.2@6.777,22.826 6.777,29.676 9.057,31.956 10.251,31.956 10.256,31.961 Q3.3
  Top Layer w1: Q3.3 13.546,32.286 15.006,30.826 AnahatR.1.5
NetB1_2: B1.2 Q6.3 R31.1 | length 22.1
  Top Layer w0.7: Q6.3 71.002,21.416 71.502,20.916 71.502,19.901 71.677,19.726 71.677,19.351 66.426,14.1 B1.2 70.6,9 R31.1
NetC2_1: C2.1 IC1.34 Y1.2 | length 17.7
  Top Layer w0.3: C2.1 55.257,40.556 55.527,40.826 55.527,44.998 57.081,46.552 IC1.34
  Top Layer w0.6: Y1.2 50.257,40.556 C2.1
NetC3_1: C3.1 IC1.33 Y1.1 | length 12.9
  Top Layer w0.3: C3.1 53.057,47.726 56.027,47.726 56.701,47.052 IC1.33
  Top Layer w0.6: Y1.1 49.037,46.766 49.967,47.696 C3.1
NetC7_1: C7.1 U1.4 | length 5.3
  Top Layer w0.7: C7.1 30.779,11.308 36.024,11.308 U1.4
NetC8_2: C8.2 U1.7 Y2.2 | length 25.2
  Top Layer w0.7: Y2.2 21.207,16.046 C8.2 ; v3(33.277,8.176) 33.431,8.176 34.106,7.501 U1.7
  Bottom Layer w0.7: Y2.2 24.967,9.426 32.777,9.426 33.168,9.035 33.168,8.285 v3(33.277,8.176)
NetC9_2: C9.2 U1.8 Y2.1 | length 17.7
  Top Layer w0.7: Y2.1 19.86,9.736 20.79,8.806 C9.2 28.397,8.806 30.972,6.231 U1.8
NetD1_2: D1.2 KornaR1.5 Q1.3 | length 17.5
  Top Layer w0.6: D1.2 7.302,55.451 8.777,56.926 10.776,56.926 10.781,56.921 Q1.3
  Top Layer w1.2: Q1.3 13.147,56.906 KornaR1.5
NetD2_2: D2.2 Dortlu1.5 Q2.3 | length 18.8
  Top Layer w0.6: D2.2 6.777,43.176 8.407,44.806 Q2.3
  Top Layer w1: Q2.3 13.297,44.806 Dortlu1.5
NetJ1_2: Designator4.2 R5.2 R8.2 | length 32.7
  Top Layer w0.3: Designator4.2@9.027,9.176 9.027,6.236 10.277,4.986 R8.2@10.277,1.926 ; v1(13.8,15) 13.8,15.575 16.685,18.46 27.365,18.46 28.375,17.45 R5.2
  Bottom Layer w0.3: Designator4.2@9.027,9.176 9.027,10.227 v1(13.8,15)
NetJ2_2: J2.2 U1.6 | length 55.1
  Top Layer w0.7: U1.6 37.517,8.771 37.927,8.361 37.927,4.351 39.902,2.376 64.301,2.376 64.351,2.426 v2(81.277,2.426)
  Bottom Layer w0.7: v2(81.277,2.426) 81.277,5.376 J2.2
NetJ2_3: J2.3 U1.5 | length 56.1
  Top Layer w0.7: U1.5 38.362,10.041 38.902,9.501 38.902,4.726 40.202,3.426 82.277,3.426 83.901,5.05 84.04,5.05 84.441,5.451 84.441,6.54 J2.3
NetLED1_1: IC1.26 LED1.1 | length 30.8
  Top Layer w0.3: v1(57.077,50.551) v1(57.077,50.551) IC1.26
  Top Layer w0.5: v1(46.177,29.976) 46.477,29.676 LED1.1
  Bottom Layer w0.5: v1(46.177,29.976) 57.077,40.876 v1(57.077,50.551)
NetLED1_2: LED1.2 R29.1 | length 2
  Top Layer w0.3: R29.1 50.277,31.576 LED1.2@50.277,29.676
NetLED2_2: LED2.2 R33.1 | length 2.1
  Top Layer w0.3: LED2.2@49.977,35.776 49.977,33.976 R33.1
NetLED3_1: LED3.1 R37.1 | length 2
  Top Layer w0.7: LED3.1 49.527,7.976 49.527,9.74 R37.1
NetLED4_1: LED4.1 R38.1 | length 2.1
  Top Layer w0.7: LED4.1 49.527,14.126 49.527,12.316 R38.1
NetOK1_1: OK1.1 R36.2 | length 2.5
  Top Layer w1: R36.2 61.452,31.201 63.547,31.201 OK1.1
NetQ1_1: Q1.1 R1.2 R2.2 | length 5.5
  Top Layer w0.6: R1.2 R2.2 9.002,53.151 9.002,53.792 9.831,54.621 Q1.1
NetQ2_1: Q2.1 R3.2 R6.2 | length 5.9
  Top Layer w0.6: R3.2 R6.2 8.502,40.551 8.502,41.151 9.306,41.955 Q2.1
NetQ3_1: Q3.1 R4.2 R7.2 | length 5.5
  Top Layer w0.6: R4.2 R7.2 8.477,28.451 8.477,29.171 9.306,30.001 Q3.1
NetQ4_1: Q4.1 R9.1 R10.2 | length 6.2
  Top Layer w0.6: R9.1 64.252,62.101 64.477,61.876 65.424,61.876 65.852,61.448 65.852,60.976 66.203,60.624 67.027,60.624 67.252,60.399 R10.2 67.272,60.096 Q4.1
NetQ4_2: "Sensor Soketi1.18" Q4.2 | length 50.6
  Top Layer w0.8: Q4.2@71,60.096 74.479,60.096 76.575,58 76.575,53.775 79.79,50.56 79.79,40.14 79.325,39.675 79.325,26.877
  Top Layer w1: 79.325,26.877 87.102,19.101 87.602,19.101
NetQ5_1: Q5.1 R12.2 | length 4.1
  Top Layer w0.6: R12.2@59.5,62.38 59.5,59.222 Q5.1@60.197,58.526
NetQ5_3: Q5.3 R10.1 | length 3.2
  Top Layer w0.6: Q5.3 61.152,60.081 61.157,60.076 R10.1
NetQ6_1: Q6.1 R34.2 | length 2.4
  Top Layer w0.7: R34.2 65.477,19.631 65.652,19.456 Q6.1
NetR13_2: "Sensor Soketi1.16" IC1.82 R13.2 | length 22.3
  Top Layer w0.3: IC1.82 78.466,41.552 v1(78.475,41.561)
  Top Layer w1: R13.2 84.027,29.368 R13.2@84.052,29.343 ; R13.2@84.15,29.35 87.7,29.35
  Bottom Layer w0.3: v1(78.475,41.561) 78.718,41.561 79.127,41.152 79.127,39.423 83.975,34.575 83.975,32.387 87.102,29.261 87.602,29.261 87.437,29.426
NetR14_2: "Sensor Soketi1.15" IC1.83 R14.2 | length 19.8
  Top Layer w0.3: IC1.83 77.865,42.052 v1(77.875,42.042)
  Top Layer w1: R14.2 84.027,34.366 R14.2@84.052,34.341 ; R14.2@84.2,34.375 87.75,34.375
  Bottom Layer w0.3: v1(77.875,42.042) 77.892,42.042 77.901,42.051 82.499,42.051 83.85,40.7 83.85,37.592 87.102,34.341 87.602,34.341 87.517,34.426
NetR15_2: "Sensor Soketi1.14" IC1.84 R15.2 | length 15.9
  Top Layer w0.3: IC1.84 78.473,42.552 v1(78.475,42.55)
  Top Layer w1: R15.2 R15.2@84.029,39.423 ; R15.2@84.15,39.3 87.7,39.3
  Bottom Layer w0.3: v1(78.475,42.55) 78.477,42.552 83.971,42.552 87.102,39.421 87.602,39.421 87.597,39.426
NetR16_2: "Sensor Soketi1.13" IC1.85 R16.2 | length 15.4
  Top Layer w0.3: IC1.85 77.79,43.052 v1(77.8,43.042)
  Top Layer w1: R16.2@84.025,44.675 87.575,44.675 ; R16.2 84.027,44.526 R16.2@84.052,44.501
  Bottom Layer w0.3: v1(77.8,43.042) 85.643,43.042 87.102,44.501 87.602,44.501 87.577,44.526
NetR17_2: "Sensor Soketi1.12" IC1.86 R17.2 | length 17.1
  Top Layer w0.3: IC1.86 78.43,43.552 v1(78.45,43.532)
  Top Layer w1: R17.2 84.027,49.556 R17.2@84.052,49.581 ; R17.2@84.15,49.525 87.7,49.525
  Bottom Layer w0.3: v1(78.45,43.532) 81.053,43.532 87.102,49.581 87.602,49.581
NetR18_2: "Sensor Soketi1.11" IC1.87 R18.2 | length 22.6
  Top Layer w0.3: IC1.87 77.776,44.052 v1(77.777,44.051)
  Top Layer w1: R18.2 R18.2@84.034,54.668 ; R18.2@84.1,54.575 87.65,54.575
  Bottom Layer w0.3: v1(77.777,44.051) 80.726,44.051 84.45,47.775 84.45,53.959 85.152,54.661 87.602,54.661
NetR19_2: "Sensor Soketi1.10" IC1.88 R19.2 | length 27.1
  Top Layer w0.3: IC1.88 78.423,44.552 v1(78.425,44.55)
  Top Layer w1: R19.2 84.027,59.858 R19.2@84.052,59.833 ; R19.2@84.175,59.725 87.725,59.725
  Bottom Layer w0.3: v1(78.425,44.55) 80.532,44.55 83.675,47.693 83.675,58.264 85.152,59.741 87.602,59.741
NetR20_2: "Sensor Soketi1.9" IC1.89 R20.2 | length 31.5
  Top Layer w0.3: IC1.89 77.801,45.052 v1(77.802,45.051)
  Top Layer w1: R20.2@84.025,64.8 87.575,64.8 ; R20.2 84.027,64.846 R20.2@84.052,64.821
  Bottom Layer w0.3: v1(77.802,45.051) 80.175,45.05 82.95,47.825 82.95,62.619 85.152,64.821 87.602,64.821
NetR21_2: "Sensor Soketi1.8" IC1.90 R21.2 | length 35.8
  Top Layer w0.3: IC1.90 78.413,45.552 v1(78.425,45.54)
  Top Layer w1: R21.2 R21.2@84.052,69.901 ; R21.2@84.175,69.825 87.725,69.825
  Bottom Layer w0.3: v1(78.425,45.54) 79.826,45.54 82.175,47.889 82.175,66.924 85.152,69.901 87.602,69.901
NetR22_2: "Sensor Soketi1.7" IC1.91 R22.2 | length 40.3
  Top Layer w0.3: IC1.91 77.826,46.052 v1(77.827,46.051)
  Top Layer w1: R22.2 84.027,74.956 R22.2@84.052,74.981 ; R22.2@84.134,75.008 87.684,75.008
  Bottom Layer w0.3: v1(77.827,46.051) 77.873,46.051 77.894,46.03 79.623,46.03 81.475,47.882 81.475,71.304 85.152,74.981 87.602,74.981
NetR23_2: "Sensor Soketi1.6" IC1.92 R23.2 | length 46.3
  Top Layer w0.3: IC1.92 78.39,46.552 v1(78.4,46.562)
  Top Layer w1: R23.2 84,78.007 84.025,78.032 85.314,78.032 87.465,80.183 87.759,80.183
  Bottom Layer w0.3: v1(78.4,46.562) 79.462,46.562 80.775,47.875 80.775,76.2 84.636,80.061 87.602,80.061
NetR24_2: "Sensor Soketi1.5" IC1.93 R24.2 | length 50.6
  Top Layer w0.3: IC1.93 77.765,47.052 v1(77.775,47.062)
  Top Layer w1: R24.2 84,80.775 86.719,83.494 86.719,84.258 87.602,85.141 87.584,85.158
  Bottom Layer w0.3: v1(77.775,47.062) 77.788,47.062 77.798,47.052 79.045,47.052 80.235,48.242 80.235,78.274 87.102,85.141 87.602,85.141
NetR25_2: "Sensor Soketi1.4" IC1.94 R25.2 | length 55.1
  Top Layer w0.3: IC1.94 78.39,47.552 v1(78.4,47.542)
  Top Layer w1: R25.2@84.025,95.3 84.025,93.797 87.602,90.221
  Bottom Layer w0.3: v1(78.4,47.542) 78.842,47.542 79.675,48.375 79.675,81.075 87.046,88.446 87.046,89.665 87.602,90.221
NetR26_2: "Sensor Soketi1.3" IC1.95 R26.2 | length 58.7
  Top Layer w0.3: IC1.95 77.759,48.052 v1(77.769,48.042)
  Top Layer w1: R26.2 84,98.2 85.9,98.2 86.6,97.5 86.6,96.302 87.602,95.301
  Bottom Layer w0.3: v1(77.769,48.042) 78.492,48.042 79.075,48.625 79.075,82.045 84.4,87.37 cw(c87.713,86.568) 84.485,87.664 ; 84.485,87.664 84.485,87.666 ccw(c84.201,87.761) 84.5,87.743 cw(c107.934,86.464) 85.977,94.749 cw(c86.406,94.586) 85.992,94.785 86.035,94.828 86.091,94.884 87.195,95.188 87.195,95.301 87.602,95.301
NetR27_2: "Sensor Soketi1.2" IC1.96 R27.2 | length 66.6
  Top Layer w0.3: IC1.96 78.252,48.552 v1(78.375,48.675)
  Top Layer w1: R27.2 84,102.025 84.025,102 85.9,102 87.519,100.381 87.602,100.381
  Bottom Layer w0.3: v1(78.375,48.675) 78.375,81.259 78.375,81.364 cw(c88.053,89.192) 75.606,89.189 cw(c88.066,89.192) 78.375,97.024 81.777,100.426 81.822,100.381 87.602,100.381
NetR28_2: "Sensor Soketi1.1" IC1.97 R28.2 | length 72.9
  Top Layer w0.3: IC1.97 77.792,49.052 v1(77.802,49.062)
  Top Layer w1: R28.2 84.044,105.443 87.584,105.443 87.602,105.461
  Bottom Layer w0.3: v1(77.802,49.062) 77.802,54.398 74.8,57.4 74.8,101.449 78.812,105.461 87.602,105.461
NetR30_2: IC1.3 R30.2 | length 48.4
  Top Layer w0.3: R30.2 53.602,16.426 56.877,19.701 56.877,31.626 59.927,34.676 v1(60.027,34.676) ; v1(73.7,50.65) 73.857,50.807 IC1.3
  Bottom Layer w0.3: v1(60.027,34.676) 73.852,48.501 73.852,50.498 v1(73.7,50.65)
NetR32_2: IC1.2 R32.2 | length 57.7
  Top Layer w0.3: R32.2 49.668,6.051 50.043,6.426 51.327,6.426 57.552,12.651 57.552,31.076 v4(60.527,34.051) ; IC1.2 74.357,50.71 v1(74.525,50.542)
  Bottom Layer w0.3: v4(60.527,34.051) 74.525,48.049 v1(74.525,50.542)
RESET: C1.2 IC1.30 R11.2 S1.1 | length 35.5
  Top Layer w0.3: S1.1 52.627,24.826 55.127,27.326 56.126,27.326 56.302,27.501 56.302,37.351 57.902,38.951 v1(57.902,39.001) ; v1(59.777,48.551) 59.778,48.552 IC1.30
  Top Layer w0.6: C1.2 50.544,20.578 50.544,24.473 R11.2 50.542,24.601 50.767,24.826 S1.1
  Bottom Layer w0.3: v1(57.902,39.001) 58.302,39.401 59.401,39.401 59.577,39.576 59.577,48.351 v1(59.777,48.551)
RST-FTDI: C1.1 U1.13 | length 13.4
  Top Layer w0.5: U1.13 44.187,11.311 v2(44.852,11.976) ; C1.1 47.817,20.566 47.817,18.386 v2(47.827,18.376)
  Bottom Layer w0.5: v2(44.852,11.976) 44.852,13.729 47.827,16.704 v2(47.827,18.376)
RXD: LED3.2 R32.1 U1.3 | length 21.3
  Top Layer w0.7: U1.3 39.567,12.581 39.977,12.171 39.977,4.961 40.387,4.551 45.543,4.551 46.118,5.126 46.493,5.126 46.668,5.301 R32.1 46.843,5.851 46.843,7.341 47.077,7.576 LED3.2
TXD: LED4.2 R30.1 U1.2 | length 14.1
  Top Layer w0.5: U1.2 36.372,13.851 38.947,16.426 R30.1
  Top Layer w0.7: R30.1 46.668,16.051 47.027,15.691 47.027,14.226 LED4.2
pads on no net: *2. AnahatR.1.1 Dortlu1.1 IC1.4 IC1.8 IC1.9 IC1.12 IC1.13 IC1.14 IC1.16 IC1.19 IC1.20 IC1.21 IC1.22 IC1.23 IC1.27 IC1.28 IC1.29 IC1.35 IC1.36 IC1.37 IC1.38 IC1.39 IC1.40 IC1.41 IC1.42 IC1.43 IC1.44 IC1.45 IC1.46 IC1.47 IC1.48 IC1.49 IC1.50 IC1.51 IC1.52 IC1.53 IC1.54 IC1.55 IC1.56 IC1.57 IC1.58 IC1.59 IC1.60 IC1.63 IC1.64 IC1.65 IC1.66 IC1.67 IC1.68 IC1.69 IC1.70 IC1.72 IC1.73 IC1.74 IC1.75 IC1.76 IC1.77 IC1.78 IC1.79 KornaR1.1 OK1.3 OK1.6 S1.3 S1.4 U1.9 U1.10 U1.11 U1.12 U1.14 U1.15

## Silkscreen, mask and mechanical layers (free items; w line width, h text height)
Top Overlay:
  text "GND" at 80.379,23.304 h1.52
  text "+5V" at 80.379,18.579 h1.52
Bottom Overlay:
  text "+12V" at 5.154,102.054 h1.52 r270
  text "GND" at 5.429,97.204 h1.52 r270
  text "SERVIS V2" at 64.65,95.1 h6
  text "2022" at 64.625,88.375 h6
  text "Kontak" at 5.479,87.654 h1.52 r270
  text "GND" at 10.671,78.504 h1
  text "Korna" at 5.454,78.129 h1.52 r270
  text "Dortlu" at 5.579,67.504 h1.52 r270
  text "Kayit" at 5.787,58.829 h1.52 r270
  text "GND" at 10.921,58.479 h1
  text "GND" at 10.771,48.004 h1
  text "Kamera1" at 5.804,47.979 h1.52 r270
  text "GND" at 9.796,38.229 h1
  text "Kamera2" at 5.229,36.654 h1.52 r270
  text "GND" at 9.371,27.804 h1
  text "Kamera3" at 5.029,25.654 h1.52 r270
  text "GND" at 9.571,17.579 h1
  text "Monitor" at 4.829,15.404 h1.52 r270
Mechanical 1:
  the board outline again, w0.254